# EAGLE board rover_2.0.0 (EAGLE 9.2.2)
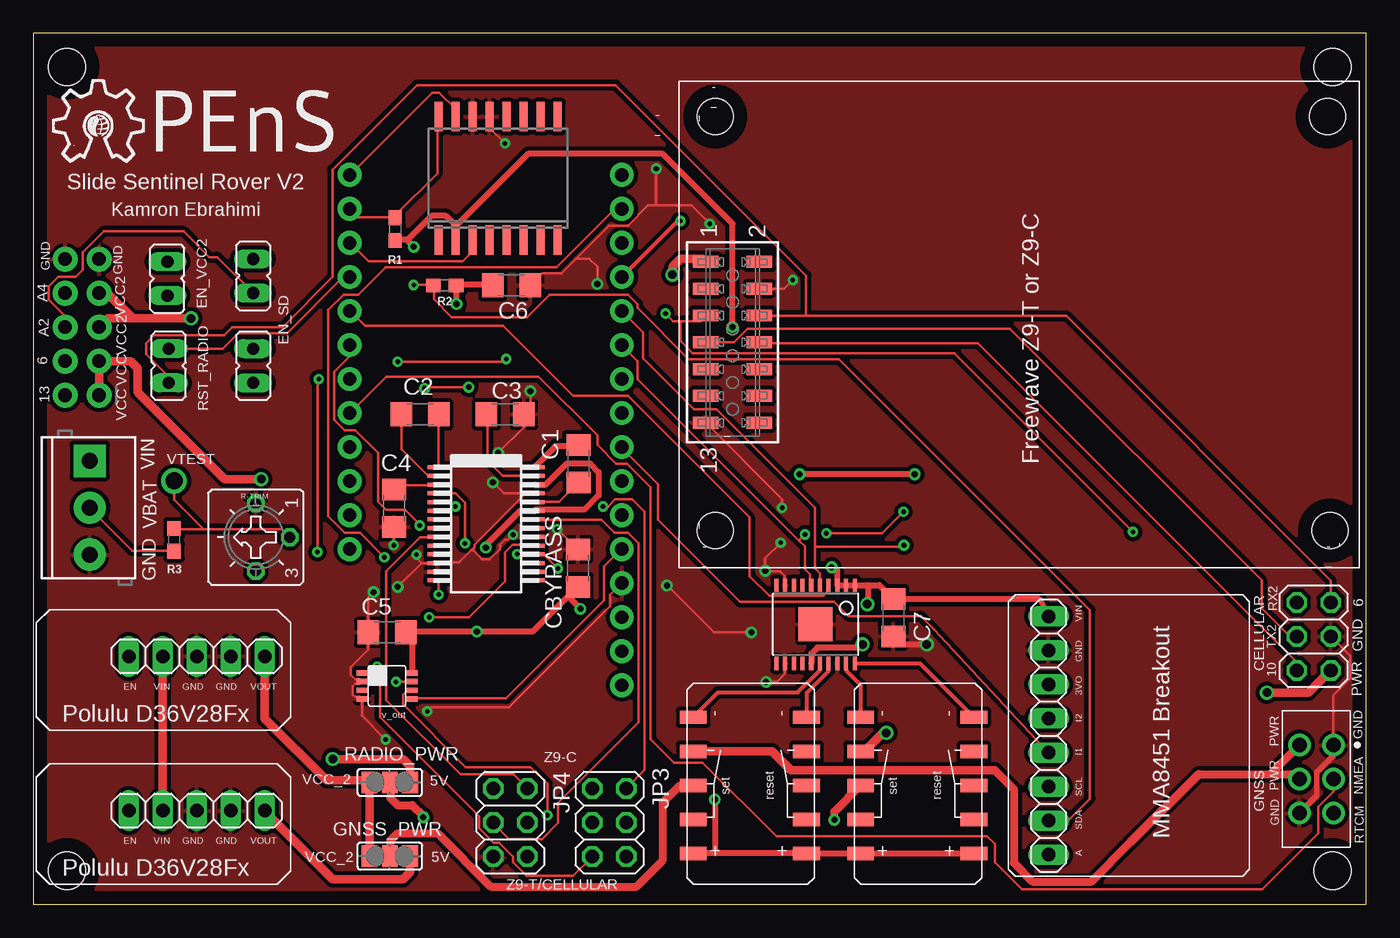
[diagram p0: board, top side]
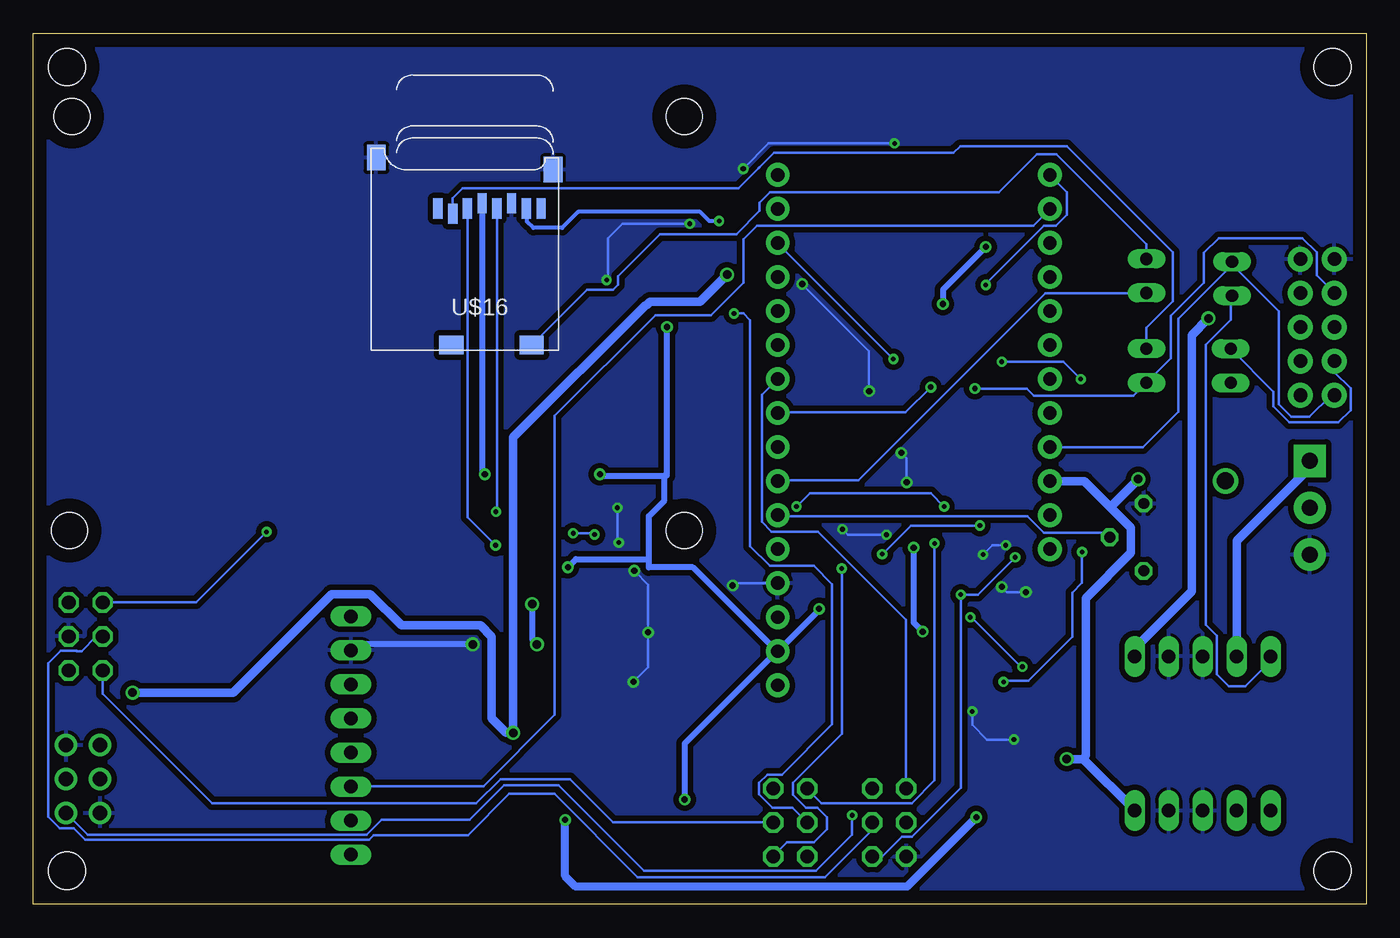
[diagram p1: board, bottom side, seen from below]

Size 99.5 x 65 mm. Coordinates in mm from the lower left corner, seen from the top.
Outline: 0,0 99.5,0 99.5,65 0,65 0,0
Copper layers (1*16): Top 0.035mm / dielectric 1.5mm / Bottom 0.035mm
Design rules "default *": minimum track width 3mil, minimum drill 0.35mm, track to track 6mil, track to pad 6mil, pad to pad 6mil, via to via 6mil, smd to smd 6mil, copper to edge 40mil, drill to drill 6mil, minimum pad ring 10mil, minimum via ring 8mil, stop-mask expansion 4mil, vias tented up to drill 30mil, thermal gap 10mil
Net classes: 0 default: width 0.203 mm, drill 0.203 mm, clearance 0.178 mm; 1 Power: width 0.635 mm, drill 0.635 mm, clearance 0.584 mm; 2 Power2: width 0.457 mm, drill 0.457 mm, clearance 0.178 mm; 3 relay: width 0.305 mm, drill 0.305 mm, clearance 0.178 mm
Holes 2.8 mm at 2.5,62.5 97,62.5 2.5,2.5 97,2.5

## Footprints (pad centres in the part's own frame; a part is rotated, then mirrored left to right if it is on the bottom)
C1206 = smd 1.6 x 1.8: 1 -1.4,0; 2 1.4,0
SO16W = smd 0.6 x 2.2: 1 -4.445,-4.6; 2 -3.175,-4.6; 3 -1.905,-4.6; 4 -0.635,-4.6; 5 0.635,-4.6; 6 1.905,-4.6; 7 3.175,-4.6; 8 4.445,-4.6; 9 4.445,4.6; 10 3.175,4.6; 11 1.905,4.6; 12 0.635,4.6; 13 -0.635,4.6; 14 -1.905,4.6; 15 -3.175,4.6; 16 -4.445,4.6
DCT_R-PDSO-G8 = smd 0.4 x 0.8: 1 -0.975,-1.875; 2 -0.325,-1.875; 3 0.325,-1.875; 4 0.975,-1.875; 5 0.975,1.875; 6 0.325,1.875; 7 -0.325,1.875; 8 -0.975,1.875
2X5_NOSILK = drill 1.016 pad 1.88: 1 0,0; 2 0,2.54; 3 2.54,0; 4 2.54,2.54; 5 5.08,0; 6 5.08,2.54; 7 7.62,0; 8 7.62,2.54; 9 10.16,0; 10 10.16,2.54
SCREWTERMINAL-3.5MM-3 = drill 1.2 pad 2.413 square: 1 0,0 | drill 1.2 pad 2.413: 2 3.5,0; 3 7,0
JP1 = drill 0.914 long: 1 0,-1.27; 2 0,1.27
2X03 = drill 1.016 octagon: 1 -2.54,-1.27; 2 -2.54,1.27; 3 0,-1.27; 4 0,1.27; 5 2.54,-1.27; 6 2.54,1.27
FEATHERWING = drill 1 pad 1.778: 1 6.35,1.27; 2 8.89,1.27; 3 11.43,1.27; 4 13.97,1.27; 5 16.51,1.27; 6 19.05,1.27; 7 21.59,1.27; 8 24.13,1.27; 9 26.67,1.27; 10 29.21,1.27; 11 31.75,1.27; 12 34.29,1.27; 13 36.83,1.27; 14 39.37,1.27; 15 41.91,1.27; 16 44.45,1.27; 17 44.45,21.59; 18 41.91,21.59; 19 39.37,21.59; 20 36.83,21.59; 21 34.29,21.59; 22 31.75,21.59; 23 29.21,21.59; 24 26.67,21.59; 25 24.13,21.59; 26 21.59,21.59; 27 19.05,21.59; 28 16.51,21.59
0603 = smd 1.1 x 1: 1 -0.85,0; 2 0.85,0
SJ_2 = smd 1.168 x 1.6: 1 -1.524,0; 2 0,0; 3 1.524,0
SSOP-28 = smd 0.3 x 1.5: 1 -4.225,-3.625; 2 -3.575,-3.625; 3 -2.925,-3.625; 4 -2.275,-3.625; 5 -1.625,-3.625; 6 -0.975,-3.625; 7 -0.325,-3.625; 8 0.325,-3.625; 9 0.975,-3.625; 10 1.625,-3.625; 11 2.275,-3.625; 12 2.925,-3.625; 13 3.575,-3.625; 14 4.225,-3.625; 15 4.225,3.625; 16 3.575,3.625; 17 2.925,3.625; 18 2.275,3.625; 19 1.625,3.625; 20 0.975,3.625; 21 0.325,3.625; 22 -0.325,3.625; 23 -0.975,3.625; 24 -1.625,3.625; 25 -2.275,3.625; 26 -2.925,3.625; 27 -3.575,3.625; 28 -4.225,3.625
POLULU_D36V28FX = drill 1.016 long: EN 0.08,-3.5; GND -7.54,-3.5; GND2 -5,-3.5; VIN -2.46,-3.5; VOUT -10.08,-3.5
CT6 = drill 0.813 octagon: A 2.515,0; E -2.515,0; S 0,-2.54
HDRV6W64P254_2X3_1016X508X838B = drill 1.105 pad 1.705: 1 -2.54,1.27; 2 0,1.27; 3 2.54,1.27; 4 2.54,-1.27; 5 0,-1.27; 6 -2.54,-1.27
TSSOP20 = smd 0.305 x 0.991: 1 -2.925,-2.918; 2 -2.275,-2.918; 3 -1.625,-2.918; 4 -0.975,-2.918; 5 -0.325,-2.918; 6 0.325,-2.918; 7 0.975,-2.918; 8 1.625,-2.918; 9 2.275,-2.918; 10 2.925,-2.918; 11 2.925,2.918; 12 2.275,2.918; 13 1.625,2.918; 14 0.975,2.918; 15 0.325,2.918; 16 -0.325,2.918; 17 -0.975,2.918; 18 -1.625,2.918; 19 -2.275,2.918; 20 -2.925,2.918 | smd 2.54 x 2.54: GND 0,0
TQ2SS = smd 1 x 2: 2 -2.16,-4.418; 3 0.38,-4.418; 4 2.92,-4.418; 7 2.92,4.04; 8 0.38,4.04; 9 -2.16,4.04; +RST -4.7,-4.418; +SET -4.7,4.04; -RST 5.46,-4.418; -SET 5.46,4.04
Z9-T/Z9-C = smd 0.89 x 1.91: 1 6.2,2; 2 6.2,-2; 3 4.2,2; 4 4.2,-2; 5 2.2,2; 6 2.2,-2; 7 0.2,2; 8 0.2,-2; 9 -1.8,2; 10 -1.8,-2; 11 -3.8,2; 12 -3.8,-2; 13 -5.8,2; 14 -5.8,-2 | hole 2.7: -13.842,1.282; 17.058,1.282; -13.842,-44.618; 17.058,-44.418
MMA8451 = drill 1.016 long: 3VO 3.81,0; A -8.89,0; GND 6.35,0; I1 -1.27,0; I2 1.27,0; SCL -3.81,0; SDA -6.35,0; VIN 8.89,0
MICROSD = smd 0.7 x 1.5: 1 9,-10.64; 2 7.9,-10.24; 3 6.8,-10.64; 4 5.7,-11.04; 5 4.6,-10.64; 6 3.5,-11.04; 7 2.4,-10.64; 8 1.3,-10.64 | smd 1.8 x 1.4: CD1 2,-0.44; CD2 8,-0.44 | smd 1.4 x 1.9: MT1 0.4,-13.54; MT2 13.6,-14.44

## Placement (x,y rotation side)
C1  .1uF  [C1206]  40.7,32.9 270 top
C2  .1uF  [C1206]  28.87,36.57 180 top
C3  .1uF  [C1206]  35.22,36.57 180 top
C4  .1uF  [C1206]  26.93,29.57 270 top
C5  .1uF  [C1206]  26.4,20.3 180 top
C6  .1uF  [C1206]  35.7,46.2 0 top
C7  .1uF  [C1206]  64.2,21.4 270 top
CBYPASS  .1uF  [C1206]  40.65,25.09 270 top
IC2  DS3231/SO  [SO16W]  34.7,54.2 0 top
IC3  741G53DCT  [DCT_R-PDSO-G8]  26.4,16.3 270 top
J1  [2X5_NOSILK]  4.9,38 90 top
J4  [SCREWTERMINAL-3.5MM-3]  4.2,33.1 270 top
JP1  [JP1]  10.1,40.2 180 top
JP2  [JP1]  10,46.7 180 top
JP3  [2X03]  43,6.1 270 top
JP4  [2X03]  35.6,6.1 270 top
JP5  [2X03]  95.6,20 90 top
JP6  [JP1]  16.4,46.9 0 top
JP7  [JP1]  16.4,40.2 0 top
MS1  FEATHERWING  [FEATHERWING]  45.2,10 90 top
R1  10k  [0603]  27,50.4 270 top
R2  10k  [0603]  30.7,46.2 0 top
R3  [0603]  10.5,27.2 270 top
SJ1  [SJ_2]  26.6,9.1 0 top
SJ2  [SJ_2]  26.6,3.6 0 top
U$1  MAX3243  [SSOP-28]  33.8,28.4 270 top
U$2  OPENS-LOGO  [OPENS-LOGO]  1.15,51.65 0 top
U$3  POLULU_D36V28FX  [POLULU_D36V28FX]  7.2,3.5 180 top
U$4  CT6EP205  [CT6]  16.6,27.4 90 top
U$5  GNSS_RECEIVER  [HDRV6W64P254_2X3_1016X508X838B]  95.8,9.35 270 top
U$7  MAX4820  [TSSOP20]  58.4,20.9 180 top
U$8  TQ2SS  [TQ2SS]  65.8,8.5 90 top
U$9  TQ2SS  [TQ2SS]  53.3,8.5 90 top
U$11  Z9-T/Z9-C  [Z9-T/Z9-C]  52.2,41.75 90 top
U$12  POLULU_D36V28FX  [POLULU_D36V28FX]  7.2,15 180 top
U$13  MMA8451  [MMA8451]  75.8,12.6 90 top
U$16  MICROSD  [MICROSD]  60.3,41.3 180 bottom

## Library data of the parts
C1-C7 CBYPASS = eagle-ltspice; SPICEMODEL: NONE; SPICEPREFIX: C
IC2 MS1 U$16 = adafruit
IC3 = 74xx-little-de
J1 = SparkFun-Connectors
J4 = SparkFun-Connectors; PROD_ID: CONN-08288; SF_ID: PRT-08235
JP1 JP2 JP6 JP7 = jumper
JP3-JP5 = pinhead
R1 R2 = SparkFun-Resistors; PROD_ID: RES-08787
R3 = SparkFun-Resistors; PROD_ID: RES-08361
SJ1 SJ2 = SparkFun-Retired
U$1 = ftdi4
U$2 = opens-logo
U$3 U$5 U$8 U$9 U$11-U$13 = SlideSentinel
U$4 = tango
U$7 = MAX4820

## Nets
3.3V_M0 [Power2]: C5.1 C6.1 C7.1 CBYPASS.2 IC2.2 IC3.8 MS1.2 R1.2 R2.2 U$1.23 U$1.26 U$7.1 U$7.2 U$7.3 U$7.15 U$8.+RST U$8.+SET U$9.+RST U$9.+SET U$13.VIN U$16.4
5: IC2.3 MS1.19
6: J1.4 JP1.1 MS1.20
9: MS1.21 U$7.4
10: JP3.6 MS1.22 U$1.18
12: MS1.24 U$5.2
13: J1.2 JP2.1 MS1.25
A0: IC3.5 MS1.5
A1: MS1.6 R3.1 U$4.S
A2: J1.6 JP6.1 MS1.7
A3: MS1.8 U$13.I1
A4: J1.8 JP7.1 MS1.9
A5: JP4.1 MS1.10
C1+: C1.1 U$1.28
CD_RADIO: JP3.4 JP5.2 U$11.8
CD_SD: JP6.2 U$16.CD1
CS_SD: JP7.2 U$16.2
FORCEOFF_MAX: JP4.3 U$1.22
GND: C3.1 C4.2 C5.2 C6.2 C7.2 CBYPASS.1 IC2.13 IC2.14 IC3.2 IC3.4 J1.9 J1.10 J4.3 JP4.5 JP5.3 MS1.4 U$1.12 U$1.13 U$1.25 U$3.GND U$3.GND2 U$4.A U$5.1 U$5.4 U$7.9 U$7.12 U$7.18 U$7.GND U$11.4 U$11.13 U$12.GND U$12.GND2 U$13.GND U$16.6 U$16.MT1 U$16.MT2
GPS_PWR: U$5.5 U$5.6 U$9.7
MISO: MS1.13 U$16.7
MOSI: MS1.12 U$7.5 U$16.3
N$1 [Power2]: SJ2.2 U$9.8
N$2 [Power2]: SJ1.2 U$8.8
N$4: C2.1 U$1.1
N$5: C2.2 U$1.2
N$10: C4.1 U$1.3
N$11: C1.2 U$1.24
N$13: C3.2 U$1.27
OUT1 [relay]: U$7.20 U$8.-RST
OUT2 [relay]: U$7.19 U$8.-SET
OUT3 [relay]: U$7.17 U$9.-RST
OUT4 [relay]: U$7.16 U$9.-SET
RADIO_PWR [Power]: JP5.1 U$8.7 U$11.1
RS232_CD_FROM_RADIO: JP3.2 U$1.5
RS232_TX_FROM_M0: JP4.2 U$1.9
RS232_TX_FROM_RADIO: JP3.1 U$1.4
RTCM_IN: IC3.6 U$5.3
RX: IC3.7 MS1.14
RX_RADIO: JP4.4 JP5.4 U$11.7
SCK: MS1.11 U$7.6 U$16.5
SCL: IC2.16 MS1.18 R1.1 U$13.SCL
SDA: IC2.15 MS1.17 R2.1 U$13.SDA
TX: JP4.6 MS1.15 U$1.14
TX_FROM_RADIO: IC3.1 JP3.5 U$1.19
TX_RADIO: JP3.3 JP5.6 U$11.5
VBAT: J4.2 R3.2
VCC [Power]: J1.1 J1.3 MS1.26 SJ1.3 SJ2.3 U$3.VOUT
VCC_2 [Power]: J1.5 J1.7 SJ1.1 SJ2.1 U$12.VOUT
VIN [Power]: J4.1 U$3.VIN U$12.VIN
X1: JP1.2 JP5.5 U$11.6
X2: JP2.2 U$12.EN

## Tracks (layer width: path | path; a pad name or v marks a point on that pad's centre or on a via)
3.3V_M0  (via drill 0.46, 0.64)
  Top 0.457: C6.1 34.26,46.23 31.59,46.23 R2.2 31.59,45.96 v31.59,44.81 | 27.95,49.61 27.06,49.61 R1.2 | 27.95,49.61 29.73,51.38 30.79,51.38 31.5,50.67 | 31.5,50.67 31.5,49.61 IC2.2 | 31.5,50.67 31.68,50.76 36.93,56.01 46.97,56.01 52.2,50.78 v52.2,43.09 | v28.39,49.07 28.04,49.43 27.95,49.61 | 50.88,3.82 57.64,3.82 U$9.+RST 57.91,3.82 61.73,3.82 U$8.+SET 61.91,3.82 70.18,3.82 U$8.+RST | 50.88,3.82 49.28,3.82 U$9.+SET | U$13.VIN 75.14,22.76 64.4,22.76 C7.1 64.13,22.85 63.15,23.82 63.14,23.82 62.3,23.82 | 39.91,22.98 40.57,23.65 CBYPASS.2 | 39.91,22.98 37.28,20.36 v33.1,20.36 27.86,20.36 C5.1 28.27,19.82 IC3.8 | 39.91,22.98 v40.84,22.05 | v50.88,7.82 50.88,3.82 | v33.78,26.62 33.78,26.82 36.33,29.38 U$1.23 37.52,29.47 41.14,29.47 42.21,30.53 42.21,32.27 41.57,32.91 39.83,32.91 38.25,31.32 U$1.26 | v59.6,25.16 59.72,25.16 60.01,24.87 60.01,23.83 U$7.3 U$7.2 U$7.1 62.3,23.82 | 62.3,23.82 62.3,22.44 v62.26,22.4 | v61.9,19.4 61.66,19.16 58.53,19.16 58.08,18.7 U$7.15 | v65.8,32.1 v57.2,32.1
  Bottom 0.457: v31.59,44.81 31.59,45.87 v28.39,49.07 | v40.84,22.05 40.84,21.96 43.86,18.94 MS1.2 | 53.55,25.76 59,25.76 v59.6,25.16 | MS1.2 44.13,19.02 50.26,25.16 53.55,25.16 53.55,25.76 | v50.88,7.82 50.88,12 44.13,18.76 MS1.2 | 52.4,32 52.4,30.14 53.55,28.98 53.55,25.76 | v52.2,43.09 52.2,32 52.4,32 | v33.78,26.62 33.78,21.04 v33.1,20.36 | v62.26,22.4 62.26,19.76 v61.9,19.4 | U$16.4 66,32.3 v65.8,32.1 | v57.2,32.1 57.1,32 52.4,32
5
  Top 0.203: IC2.3 32.75,49.52 32.75,48.72 32.04,48.01 25.01,48.01 23.68,49.34 MS1.19
6
  Top 0.203: MS1.20 23.59,46.76 23.06,46.76 18.93,42.63 15.29,42.63 14.12,41.47 JP1.1
  Bottom 0.203: J1.4 2.36,39.72 1.14,38.51 1.14,36.9 2.06,35.97 5.71,35.97 6.91,37.17 6.91,38.28 JP1.1
9
  Top 0.203: U$7.4 59.38,23.43 58.97,23.02 54.94,23.02 53.46,24.5 53.46,28.89 44.41,37.95 40.29,37.95 35.07,43.17 24.78,43.17 23.68,44.27 MS1.21
10  (via drill 0.35)
  Top 0.203: v39.15,25.07 38.17,26.05 37.46,26.05 U$1.18 37.37,26.14 v36.13,26.14 | v28.84,28.27 28.84,28.36 27.75,29.45 26.33,29.45 25.73,30.05 25.73,33.69 24.02,35.39 23.22,35.39 22.44,36.18 22.44,39.74 23.59,40.89 23.59,41.69 MS1.22
  Bottom 0.203: v39.15,25.07 39.15,12.71 42.79,9.07 42.79,8.18 41.82,7.2 40.97,7.2 40.26,6.49 40.26,5.59 41.23,4.62 43.24,4.62 44.22,3.65 JP3.6 | v28.84,28.27 33.99,28.27 v36.13,26.14
12
  Top 0.203: MS1.24 23.68,36.72 26.35,39.38 37.73,39.38 42.11,35 42.11,34.29 43.52,32.88 44.32,32.88 46.08,31.11 46.08,12.31 47.82,10.58 49.96,10.58 55.47,5.07 71.21,5.07 71.77,4.5 71.77,3.15 73.8,1.12 91.74,1.12 95.94,5.32 95.94,7.28 97.07,8.41 U$5.2
13
  Bottom 0.203: 9.99,47.75 14.02,43.72 14.02,36.78 16.67,34.13 MS1.25 | JP2.1 10,47.76 9.99,47.75 | J1.2 2.6,38 4.23,36.37 5.57,36.37 6.53,37.33 6.53,44.28 9.99,47.75
A0
  Top 0.203: IC3.5 28.3,15.38 35.3,15.38 42.61,22.68 42.61,25.24 43.86,26.49 MS1.5
A1  (via drill 1.27)
  Top 0.203: 12.7,28 18.52,28 19.06,27.47 U$4.S | 12.7,28 10.52,28 R3.1 | 12.7,28 10.5,30.2 v10.5,31.6
  Bottom 0.203: MS1.6 43.86,28.98 25.29,28.98 24.05,27.74 19.41,27.74 19.14,27.46 U$4.S
A2
  Top 0.203: JP6.1 13.71,48.31 13.11,48.31 11.2,50.23 5.24,50.23 3.68,48.66 3.68,47.38 3.14,46.84 1.85,46.84 1.14,46.12 1.14,45.12 2.36,43.9 J1.6
  Bottom 0.203: MS1.7 43.86,31.65 37.91,31.65 23.95,45.61 16.42,45.61 JP6.1
A3
  Top 0.203: U$13.I1 67.23,20.54 66.25,21.51 60.84,21.51 59.79,22.57 52.76,22.57 46.64,28.69 46.64,31.36 43.95,34.05 MS1.8
A4  (via drill 0.4)
  Top 0.203: v32.5,38.6 29.3,38.6 v29.2,38.5
  Bottom 0.203: MS1.9 43.86,36.72 34.38,36.72 v32.5,38.6 | v29.2,38.5 25.32,38.5 24.78,37.97 17.36,37.97 JP7.1 14.58,40.75 14.58,43.92 12.1,46.4 12.1,48.63 11,49.73 4.74,49.73 3.68,48.66 3.68,46.94 J1.8
A5
  Bottom 0.203: JP4.1 34.35,8.71 34.35,21.25 40.93,27.83 44.4,27.83 45.11,28.54 45.11,38.05 43.95,39.2 MS1.10
C1+
  Top 0.203: 40.66,34.23 C1.1
  Top 0.457: U$1.28 39.03,34.23 40.66,34.23
CD_RADIO
  Top 0.203: U$11.8 54.26,41.87 70.51,41.87 94.33,18.05 JP5.2
  Bottom 0.203: JP3.4 44.31,6.13 56.22,6.13 59.43,9.35 64.63,9.35 66.44,7.53 86.16,7.53 94.33,15.71 JP5.2
CD_SD
  Bottom 0.203: U$16.CD1 58.17,45.87 56.24,45.87 55.87,46.24 55.87,46.86 52.72,50.01 47.01,50.01 45.27,51.75 45.27,52.38 44.5,53.15 27.42,53.15 24.58,55.99 23.14,55.99 16.4,49.26 JP6.2
CS_SD
  Bottom 0.203: U$16.2 68.2,52.7 67.45,53.44 46.85,53.44 45.37,54.92 45.3,55 44.2,56.1 30.8,56.1 30.3,56.6 22.35,56.6 14.42,48.67 14.42,45.03 16.4,43.05 JP7.2
FORCEOFF_MAX
  Top 0.203: U$1.22 37.46,28.71 42.42,28.71 43.39,27.74 44.4,27.74 45.17,26.96 45.17,13.58 39.18,7.59 39.18,6.08 37.97,4.87 35.53,4.87 34.35,6.04 JP4.3
GND  (via drill 0.35, 0.4, 0.46, 0.64)
  Top 0.203: 32.68,26.42 31.77,25.51 30.26,25.51 U$1.12 28.97,25.48 | 32.68,26.42 32.93,26.67 32.93,26.85 36.75,30.67 37.37,30.67 U$1.25 35.12,30.68 v34.3,31.5 | U$7.9 56.08,23.86 56.08,24.52 55.73,24.87 54.67,24.87 v54.64,24.9 54.64,25.84 v55.8,27 | v54.7,16.6 55.5,16.6 56.12,17.23 U$7.12 | v47.3,23.8 50.8,20.3 v53.6,20.3 | v34.7,33.7 36.62,35.62 C3.1 37.1,37.05 v37.1,38.3 | v42.1,46.3 42.1,47.6 41.5,48.2 40.52,48.2 | 40.52,48.2 39.42,47.09 38,47.09 C6.2 | 28.97,25.48 v27.2,23.7 | v25.4,23.3 25,22.9 C5.2 25,19.01 23.67,17.68 23.67,17.13 24.01,16.8 24.35,16.8 IC3.2 24.35,16.45 24.01,16.45 23.85,16.29 23.85,15.66 24.01,15.5 24.35,15.5 IC3.4 24.52,14.07 v26.3,12.3 | 40.52,48.2 42.99,50.67 44.4,50.67 45.9,52.16 46.5,52.16 | 46.5,52.16 v46.5,54.9 | v35.2,56.8 34.07,57.94 IC2.13 | 46.5,52.16 49.14,52.16 v50.5,50.8 | v56.7,46.6 56.05,45.95 U$11.4 | U$11.13 55.9,30.25 v55.9,29.6 | v35.81,27.59 35.43,27.2 35.22,27.2 34.84,26.82 34.84,26.52 34.06,25.74 33.49,25.74 32.81,26.42 32.68,26.42 | v39.1,28 39.14,28 CBYPASS.1 | v29.4,14.4 29.7,14.7 35.53,14.7 43.06,22.23 43.06,23.1 MS1.4 | 28.97,25.48 28.6,25.85 v28.6,26.1 | v26.9,26.8 26.9,28.14 C4.2 | 97.07,11.7 97.07,15.61 98.32,16.86 98.32,18.55 JP5.3
  Top 0.406: U$5.4 95.84,8.12 95.84,9.86 97.07,11.1 97.07,11.7 U$5.1
  Top 0.457: C7.2 64.8,19.4 v66.7,19.4
  Bottom 0.203: v54.64,24.9 53.6,23.86 v53.6,20.3 53.6,17.7 v54.7,16.6 | MS1.4 47.13,23.97 v47.3,23.8 | v34.3,31.5 34.3,33.3 v34.7,33.7 | v37.1,38.3 37.1,41.3 v42.1,46.3 | v27.2,23.7 26.8,23.3 v25.4,23.3 | v46.5,54.9 44.6,56.8 v35.2,56.8 | v50.5,50.8 55.5,50.8 56.6,49.7 56.6,46.7 v56.7,46.6 | v55.9,29.6 55.9,27.1 v55.8,27 | v35.81,27.59 38.69,27.59 v39.1,28 | v26.3,12.3 28.3,12.3 29.4,13.4 v29.4,14.4 | v28.6,26.1 27.9,26.8 v26.9,26.8
  Bottom 0.457: v66.7,19.4 75.35,19.4 U$13.GND
  pour Top (isolate 0.305): 0,65 99.5,65 99.5,0 0,0
  pour Bottom (isolate 0.406): 0,65 99.5,65 99.5,0 0,0
GPS_PWR
  Top 0.61: 71.79,10.02 73.2,8.61 73.2,3.1 74.6,1.7 79,1.7 81.92,4.62 | 87,9.7 92.34,9.7 | 92.34,9.7 U$5.6 | 92.34,9.7 94.18,9.7 U$5.5
  Top 0.635: U$9.7 55.15,11.42 56.55,10.02 71.79,10.02 | 81.92,4.62 87,9.7
MISO  (via drill 0.35)
  Top 0.305: MS1.13 48.1,51 v48.3,51
  Bottom 0.305: U$16.7 62.66,51.9 62.66,50.96 62.18,50.48 60.02,50.48 58.83,51.68 49.72,51.68 49.03,51 v48.3,51
MOSI  (via drill 0.4)
  Top 0.203: 58.35,26.7 58.35,29.6 51.01,36.95 49.31,36.95 45.51,40.75 45.51,42.72 43.95,44.27 MS1.12 | 58.35,26.7 58.35,25.07 58.71,24.71 58.71,23.85 U$7.5 | v64.99,26.8 64.89,26.7 58.35,26.7
  Bottom 0.203: U$16.3 67.1,28.91 v64.99,26.8
N$1
  Top 0.61: SJ2.2 26.65,3.65 26.65,4.77 27.17,5.29 30.18,5.29 34.15,1.32 45.02,1.32 47,3.3 47,7.6 48.28,8.88 U$9.8
N$2  (via drill 0.46)
  Top 0.61: v29.1,6.5 29.1,6.6 28.29,7.41 27.17,7.41 26.65,7.93 26.65,9.05 SJ1.2 | v59.8,6.3 59.8,6.92 U$8.8
  Bottom 0.61: v29.1,6.5 34.28,1.32 59.02,1.32 59.8,2.1 v59.8,6.3
N$4
  Top 0.203: U$1.1 30.26,32.63 30.26,36.54 C2.1
N$5
  Top 0.203: U$1.2 30.17,32 29.46,32 27.5,33.96 27.5,36.54 C2.2
N$10
  Top 0.203: U$1.3 30.17,31.29 27.24,31.29 26.97,31.03 C4.1
N$11
  Top 0.203: U$1.24 37.46,30.05 39.24,30.05 40.66,31.47 C1.2
N$13
  Top 0.203: U$1.27 37.37,32 35.03,32 33.9,33.13 33.9,36.54 C3.2
OUT1
  Top 0.305: U$7.20 66.2,17.98 U$8.-RST
OUT2
  Top 0.305: U$7.19 60.68,17.48 61.76,16.4 U$8.-SET
OUT3
  Top 0.305: U$9.-RST 57.72,15.76 59.38,17.41 U$7.17
OUT4
  Top 0.305: U$9.-SET 51.11,15.81 57.06,15.81 58.73,17.48 U$7.16
RADIO_PWR  (via drill 0.64)
  Top 0.635: v63.69,12.8 63.42,12.8 62.09,11.47 61.82,11.47 U$8.7 | v47.71,47 v47.7,47.01 47.7,47.6 48.3,48.2 49.95,48.2 U$11.1 | v92.1,15.8 93.64,15.8 95.21,15.8 JP5.1
  Bottom 0.635: v47.71,47 49.72,44.98 53.46,44.98 53.72,44.73 53.82,44.73 63.69,34.86 v63.69,12.8 64.2,12.8 65.28,13.88 65.28,19.99 66.11,20.82 72.02,20.82 74.35,23.15 77.25,23.15 84.61,15.8 v92.1,15.8
RS232_CD_FROM_RADIO  (via drill 0.35)
  Top 0.203: v31.5,29.69 31.24,29.96 30.26,29.96 U$1.5 | v42.53,29.69 42.88,29.69 43.42,30.23 44.7,30.23 45.63,29.29 45.63,10.04 44.31,8.71 JP3.2
  Bottom 0.203: v42.53,29.69 41.53,30.69 32.5,30.69 v31.5,29.69
RS232_TX_FROM_M0
  Top 0.203: U$1.9 30.17,27.38 28.86,27.38 26.34,24.86 26.34,15.25 31.89,9.69 35.86,9.69 36.84,8.71 JP4.2
RS232_TX_FROM_RADIO  (via drill 0.35)
  Top 0.203: v32.22,26.94 32.22,29.96 31.5,30.67 30.26,30.67 U$1.4
  Bottom 0.203: v32.22,26.94 32.22,9.25 33.9,7.56 40.66,7.56 41.73,8.62 JP3.1
RTCM_IN  (via drill 0.35)
  Top 0.203: v38.37,6.64 38.37,9 37.13,10.25 32.27,10.25 27.59,14.92 27.59,15.65 27.86,15.91 28.21,15.91 IC3.6
  Bottom 0.203: v38.37,6.64 38.37,5.2 41.08,2.49 53.91,2.49 60.31,8.89 64.35,8.89 66.94,6.3 73.52,6.3 74.61,5.21 95.47,5.21 U$5.3
RX  (via drill 0.35)
  Top 0.203: IC3.7 28.25,16.6 v27.07,16.6 | v21.2,26.3 21.2,39.1 v21.3,39.2 | v27.2,40.5 35.1,40.5 v35.3,40.7
  Bottom 0.203: v21.2,26.3 21.2,23.99 21.93,23.26 21.93,19.97 25.2,16.7 26.97,16.7 v27.07,16.6 | v21.3,39.2 22.6,40.5 v27.2,40.5 | v35.3,40.7 43.93,49.33 MS1.14
RX_RADIO
  Top 0.203: U$11.7 50.26,41.96 52.3,41.96 53.31,42.97 72.9,42.97 91.7,24.17 91.7,22.1 93.8,20 JP5.4
  Bottom 0.203: JP4.4 36.87,5.57 40.41,2.03 54.39,2.03 60.59,8.23 63.98,8.23 67.05,5.16 74.12,5.16 74.45,4.83 95.63,4.83 96.48,5.68 97.54,5.68 98.38,6.52 98.38,18 97.47,18.91 96.27,18.91 96.26,18.9 95.9,18.9 94.8,20 JP5.4
SCK  (via drill 0.35)
  Top 0.203: 57.21,27.11 45.11,39.2 45.11,40.54 43.95,41.69 MS1.11 | 57.21,27.11 57.6,26.71 57.6,25.02 57.98,24.64 57.98,23.92 U$7.6 | v64.97,29.3 63.37,27.7 v59.2,27.7 | v57.6,27.6 57.21,27.2 57.21,27.11
  Bottom 0.203: U$16.5 64.9,29.37 v64.97,29.3 | v59.2,27.7 57.7,27.7 v57.6,27.6
SCL
  Top 0.203: MS1.18 23.68,51.83 24.21,51.3 26.97,51.3 R1.1 26.97,51.38 30.17,54.59 30.17,58.76 IC2.16
  Bottom 0.203: U$13.SCL 75.75,8.8 65.91,8.8 60.57,14.13 60.57,36.45 53.05,43.98 48.92,43.98 46.5,46.4 46.5,49.62 45.46,50.66 24.85,50.66 23.68,51.83 MS1.18
SDA  (via drill 0.35)
  Top 0.203: v28.39,46.23 29.81,46.23 R2.1 29.9,46.14 29.9,45.16 31.24,43.83 36.84,43.83 38.53,45.52 44.4,45.52 45.11,44.81 45.11,44.52 48.93,40.69 60.15,40.69 78.89,21.96 78.89,7.89 77.25,6.25 U$13.SDA | IC2.15 31.5,58.85 31.5,59.38 30.3,60.59 29.77,60.59 23.68,54.5 MS1.17
  Bottom 0.203: v28.39,46.23 28.39,46.33 24.06,50.66 23.16,50.66 22.34,51.48 22.34,53.15 23.59,54.41 MS1.17
TX  (via drill 0.35)
  Top 0.203: v30.26,23.11 30.26,24.09 U$1.14 | MS1.15 43.86,51.83 43.35,51.83 39.07,47.55 26.28,47.55 24.25,45.52 23.15,45.52 21.99,44.36 21.99,28.98 23.25,27.73 24.37,27.73 v26.2,25.9
  Bottom 0.203: JP4.6 36.14,3.56 34.64,5.06 33.9,5.06 30.26,8.7 v30.26,23.11 28.99,23.11 v26.2,25.9
TX_FROM_RADIO  (via drill 0.35)
  Top 0.203: 25.05,17.12 25.88,16.29 25.88,13.98 33.28,6.58 33.28,5.89 33.29,5.88 33.29,5.67 34.36,4.6 34.76,4.6 35.83,3.53 35.83,3.13 36.83,2.12 40.29,2.12 JP3.5 | 25.05,17.12 24.93,17.25 24.57,17.25 IC3.1 | 25.05,17.12 v25.66,17.73 | U$1.19 37.37,26.85 35.77,26.85 35.2,26.28 35.2,24.1 32.53,21.43 v29.55,21.43
  Bottom 0.203: v25.66,17.73 25.76,17.73 29.45,21.43 v29.55,21.43
TX_RADIO  (via drill 0.35)
  Top 0.203: U$11.5 49.79,43.54 48.4,43.54 | 48.4,43.54 48.3,43.44 48.3,42.06 49.21,41.15 68.75,41.15 v82.1,27.8 | 48.4,43.54 47.76,43.54 v47.2,44.1
  Bottom 0.203: JP3.3 42.83,7.2 44.3,7.2 45.31,8.21 45.31,9.07 44.7,9.68 43.61,9.68 39.86,13.44 39.86,23.9 41.22,25.26 44.52,25.26 46,26.74 46,43.6 46.5,44.1 v47.2,44.1 | v82.1,27.8 87.36,22.54 JP5.6
VBAT
  Top 0.203: R3.2 10.43,26.4 7.36,26.4 4.23,29.53 J4.2
VCC  (via drill 0.64)
  Top 0.635: SJ2.3 28.13,3.56 28.13,2.4 27.59,1.87 22.35,1.87 17.28,6.93 U$3.VOUT | v22.35,10.85 27.59,10.85 28.13,10.31 28.13,9.16 SJ1.3 | v17.01,31.74 14.26,31.74 7.78,38.22 7.78,40.02 7.26,40.54 J1.3 J1.1
  Bottom 0.635: 21.1,10.85 v22.35,10.85 | 21.1,10.85 17.28,7.02 U$3.VOUT | 19.1,29.65 17.55,28.09 17.55,26.23 20.93,22.85 20.93,11.11 21.1,10.85 | 19.1,29.65 21.01,31.56 23.59,31.56 MS1.26 | 19.1,29.65 v17.01,31.74
VCC_2  (via drill 0.64)
  Top 0.635: SJ2.1 25.1,3.65 25.1,9.07 SJ1.1 24.84,9.25 21.9,9.25 17.28,13.87 U$12.VOUT | v11.77,43.74 7.4,43.74 | 7.4,43.74 5.56,43.74 J1.5 | 7.4,43.74 5.52,45.62 J1.7
  Bottom 0.635: U$12.VOUT 17.19,18.58 17.19,19.2 13.02,23.37 13.02,42.49 v11.77,43.74
VIN
  Top 0.635: U$3.VIN 9.63,7.02 9.63,18.49 U$12.VIN
  Bottom 0.635: J4.1 4.23,33.08 4.23,32.55 9.63,27.15 9.63,18.58 U$12.VIN
X1
  Top 0.203: 57.69,43.92 77.11,43.92 96.87,24.16 JP5.5 | 57.69,43.92 54.26,43.92 U$11.6 | 57.69,43.92 57.69,46.93 43.47,61.14 28.64,61.14 22.34,54.84 22.34,46.84 18.59,43.09 14.84,43.09 14.24,42.49 10.08,42.49 10.05,42.46 8.98,42.46 8.4,41.88 8.4,41.06 10.08,39.38 10.08,38.95 JP1.2
X2
  Bottom 0.203: JP2.2 10.08,45.43 10.08,43.65 11.96,41.77 11.96,20.86 11.15,20.05 11.15,17.16 10.26,16.27 9.01,16.27 7.15,18.14 7.15,18.49 U$12.EN

## Text on the board
tNames: Slide Sentinel Rover V2 | Kamron Ebrahimi | GND | GND | VCC2 | A4 | A2 | VCC2 | EN_VCC2 | EN_SD | 6 | VCC | VCC | 13 | RST_RADIO | VTEST | VIN | R-TRIM | VBAT | GND | RX2 | 6 | TX2 | GND | CELLULAR | 10 | PWR | v_out | PWR | GND | RADIO_PWR | Z9-C | VCC_2 | 5V | PWR | NMEA | GNSS | GND | GNSS_PWR | RTCM | VCC_2 | 5V | Z9-T/CELLULAR